# EAGLE board krajBB-Mojžiš_Matej3 (EAGLE 7.7.0)
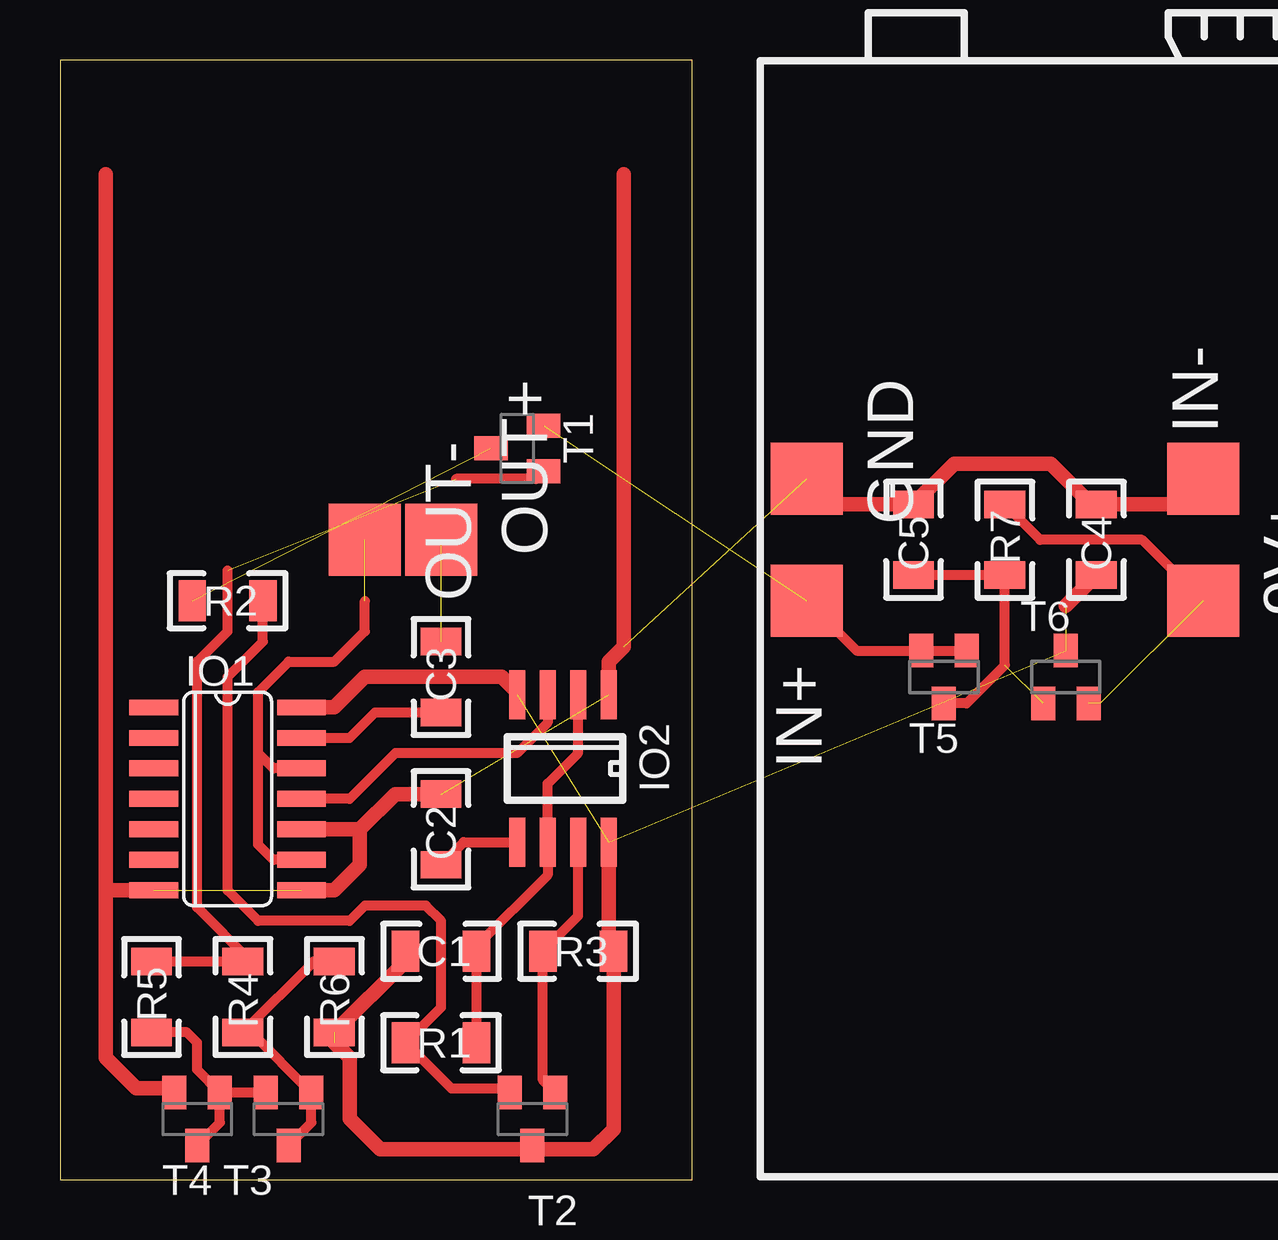
[diagram p0: board, top side]

Size 26.34 x 46.66 mm. Coordinates in mm from the lower left corner, seen from the top.
Outline: 0,0 26.34,0 26.34,46.66 0,46.66 0,0
Copper layers (1*16): Top 0.035mm / dielectric 1.5mm / Bottom 0.035mm
Design rules "default *": minimum track width 10mil, minimum drill 24mil, track to track 8mil, track to pad 8mil, pad to pad 8mil, via to via 8mil, smd to smd 8mil, copper to edge 16mil, drill to drill 8mil, minimum pad ring 10mil, minimum via ring 8mil, stop-mask expansion 4mil, vias tented up to drill 0mil, thermal gap 10mil

## Footprints (pad centres in the part's own frame; a part is rotated, then mirrored left to right if it is on the bottom)
SMD3X3 = smd 3 x 3: P$1 0,0
1206 = smd 1.143 x 1.702: 1 -1.473,0; 2 1.473,0
SO14 = smd 0.66 x 2.032: 1 -3.81,-3.073; 2 -2.54,-3.073; 3 -1.27,-3.073; 4 0,-3.073; 5 1.27,-3.073; 6 2.54,-3.073; 7 3.81,-3.073; 8 3.81,3.073; 9 2.54,3.073; 10 1.27,3.073; 11 0,3.073; 12 -1.27,3.073; 13 -2.54,3.073; 14 -3.81,3.073
SO08 = smd 0.66 x 2.032: 1 -1.905,-3.073; 2 -0.635,-3.073; 3 0.635,-3.073; 4 1.905,-3.073; 5 1.905,3.073; 6 0.635,3.073; 7 -0.635,3.073; 8 -1.905,3.073
LD-DR-3519 = drill 1 pad 1.93 long: P$1 -3,-15; P$2 3,-15
SOT23-BEC = smd 1 x 1.4: B -0.95,-1.1; C 0,1.1; E 0.95,-1.1
SOT23 = smd 1 x 1.4: 1 -0.95,-1.1; 2 0.95,-1.1; 3 0,1.1

## Placement (x,y rotation side)
9V+  SMD3X3  [SMD3X3]  47.62,24.13 90 top  (outside the outline)
C1  1u  [1206]  15.88,9.53 180 top
C2  1u  [1206]  15.88,14.61 270 top
C3  1u  [1206]  15.88,20.95 90 top
C4  1u  [1206]  43.18,26.67 270 top  (outside the outline)
C5  1u  [1206]  35.56,26.67 270 top  (outside the outline)
GND  SMD3X3  [SMD3X3]  31.11,29.21 90 top  (outside the outline)
IN+  SMD3X3  [SMD3X3]  31.11,24.13 90 top  (outside the outline)
IN-  SMD3X3  [SMD3X3]  47.62,29.21 90 top  (outside the outline)
IO1  4013D  [SO14]  6.99,15.88 270 top
IO2  NE555D  [SO08]  20.95,17.14 180 top
OUT+  SMD3X3  [SMD3X3]  15.88,26.67 90 top
OUT-  SMD3X3  [SMD3X3]  12.7,26.67 90 top
R1  100  [1206]  15.88,5.71 0 top
R2  470  [1206]  6.99,24.13 0 top
R3  10k  [1206]  21.59,9.53 0 top
R4  10k  [1206]  7.62,7.62 270 top
R5  2.2k  [1206]  3.81,7.62 90 top
R6  47k  [1206]  11.43,7.62 270 top
R7  10M  [1206]  39.37,26.67 90 top  (outside the outline)
REPRODUKTOR  LD-DR-3519  [LD-DR-3519]  76.83,23.5 0 top  (outside the outline)
T1  BC817-25  [SOT23-BEC]  19.05,30.48 90 top
T2  BC817-25  [SOT23-BEC]  19.68,2.54 180 top
T3  BC817-25  [SOT23-BEC]  9.53,2.54 180 top
T4  BC817-25  [SOT23-BEC]  5.71,2.54 180 top
T5  BSS84  [SOT23]  36.83,20.95 180 top  (outside the outline)
T6  BSS84  [SOT23]  41.91,20.95 0 top  (outside the outline)
U$1  9VBATTERY  [9VBATTERY]  43.18,24.13 0 top  (outside the outline)

## Library data of the parts
9V+ GND IN+ IN- OUT+ OUT- = solpad
C1-C5 R1-R7 = rcl
IO1 = 40xx
IO2 = linear
REPRODUKTOR = buzzer
T1-T4 = transistor-npn
T5 T6 = transistor-small-signal
U$1 = battery

## Nets
9V_1: R4.2 R6.1 T3.B T3.C
9V_2: R5.1 T3.E T4.B T4.C
+9V: C1.2 C4.2 IO1.14 IO2.4 IO2.8 R3.2 R6.2 T2.C T6.3
CLOCK: IO1.11 IO2.3
CV: C2.2 IO2.5
DIS: IO2.7 R3.1 T2.B
DIS_1: R2.1 T1.C
DIS_IN: R1.1 R2.2 T2.E
DIV: R4.1 R5.2 T1.B
GND: C2.1 C4.1 C5.1 GND.P$1 IN-.P$1 IO1.7 IO1.8 IO1.10 IO2.1 T4.E
IN: IN+.P$1 T1.E T5.1 T5.2
MOS: C5.2 R7.1 T5.3 T6.1
OUT: C3.1 IO1.13
REP: C3.2 OUT+.P$1
REP+: IO1.9 IO1.12 OUT-.P$1
THR: C1.1 IO2.2 IO2.6 R1.2
VIN: 9V+.P$1 R7.2 T6.2

## Tracks (layer width: path | path; a pad name or v marks a point on that pad's centre or on a via)
9V_1
  Top 0.406: T3.C 10.47,2.39 T3.B 7.97,6.15 R4.2 10.57,9.09 R6.1
9V_2
  Top 0.406: T3.E T4.B | T4.B 6.67,2.39 T4.C 5.54,1.27 | T4.B 5.71,4.59 5.71,5.71 5.28,6.15 R5.1
+9V  (4 unrouted)
  Top 0.61: R6.2 14.4,9.12 C1.2 | 11.43,5.71 12.06,5.08 12.06,2.54 13.34,1.27 19.52,1.27 T2.C 19.86,1.27 22.23,1.27 23.06,2.11 R3.2 22.86,9.73 IO2.8 | IO1.14 11.43,19.68 12.7,20.95 18.41,20.95 19.05,20.32 IO2.4 | C4.2 41.91,23.93
CLOCK
  Top 0.406: IO2.3 20.32,19.05 19.05,17.78 13.97,17.78 12.06,15.88 IO1.11
CV
  Top 0.406: C2.2 16.82,14.07 IO2.5
DIS
  Top 0.406: T2.B 20.12,4.16 R3.1 21.59,11 IO2.7
DIS_1  (1 unrouted)
DIS_IN
  Top 0.406: T2.E 18.57,3.81 16.31,3.81 R1.1 15.88,7.19 15.88,10.79 15.24,11.43 12.7,11.43 12.06,10.79 8.26,10.79 6.99,12.06 6.99,20.95 8.46,22.43 R2.2
DIV  (1 unrouted)
  Top 0.406: R5.2 4.13,9.41 | T1.B 19.83,29.21 16.51,29.21 | R5.2 R4.1 7.97,9.09 5.71,11.35 5.71,21.59 6.99,22.86 6.99,25.4 | R5.2
GND  (3 unrouted)
  Top 0.61: T4.E 4.59,3.81 3.17,3.81 1.91,5.08 1.91,12.06 | 1.91,12.06 1.91,41.91 | IO1.7 1.91,12.06 | IO1.10 12.5,14.61 | IO1.8 11.43,12.06 12.5,13.13 12.5,14.61 | 12.5,14.61 13.97,16.08 C2.1 | 23.5,41.91 23.5,22.23 22.86,21.59 IO2.1 | GND.P$1 32.18,28.14 C5.1 37.26,29.84 41.27,29.84 42.98,28.14 C4.1 46.56,28.14 IN-.P$1
IN  (1 unrouted)
  Top 0.406: IN+.P$1 33.19,22.05 T5.2 T5.1
MOS  (1 unrouted)
  Top 0.406: C5.2 R7.1 39.37,21.45 37.78,19.86 T5.3
OUT
  Top 0.406: IO1.13 12.06,18.41 13.13,19.48 C3.1
REP  (1 unrouted)
REP+  (1 unrouted)
  Top 0.406: IO1.9 8.89,13.34 8.26,13.97 8.26,17.78 | IO1.12 8.89,17.14 8.26,17.78 | 8.26,17.78 8.26,20.32 9.53,21.59 11.43,21.59 12.7,22.86 12.7,24.13
THR
  Top 0.406: R1.2 C1.1 17.35,9.73 20.32,12.7 IO2.6 20.32,16.51 21.59,17.78 IO2.2
VIN  (2 unrouted)
  Top 0.406: R7.2 40.84,26.67 45.09,26.67 9V+.P$1